# Altium PCB PCB_layout.PcbDoc
Units mil, origin at the board's own origin, x right, y up, seen from the top; angles counter-clockwise.
Board outline 2835 x 2605 mil, 2 copper layers (Top Layer, Bottom Layer); 31 components, 31 nets, 111 pads, 6 vias.
Unrouted connection lines stored in the file: 1.
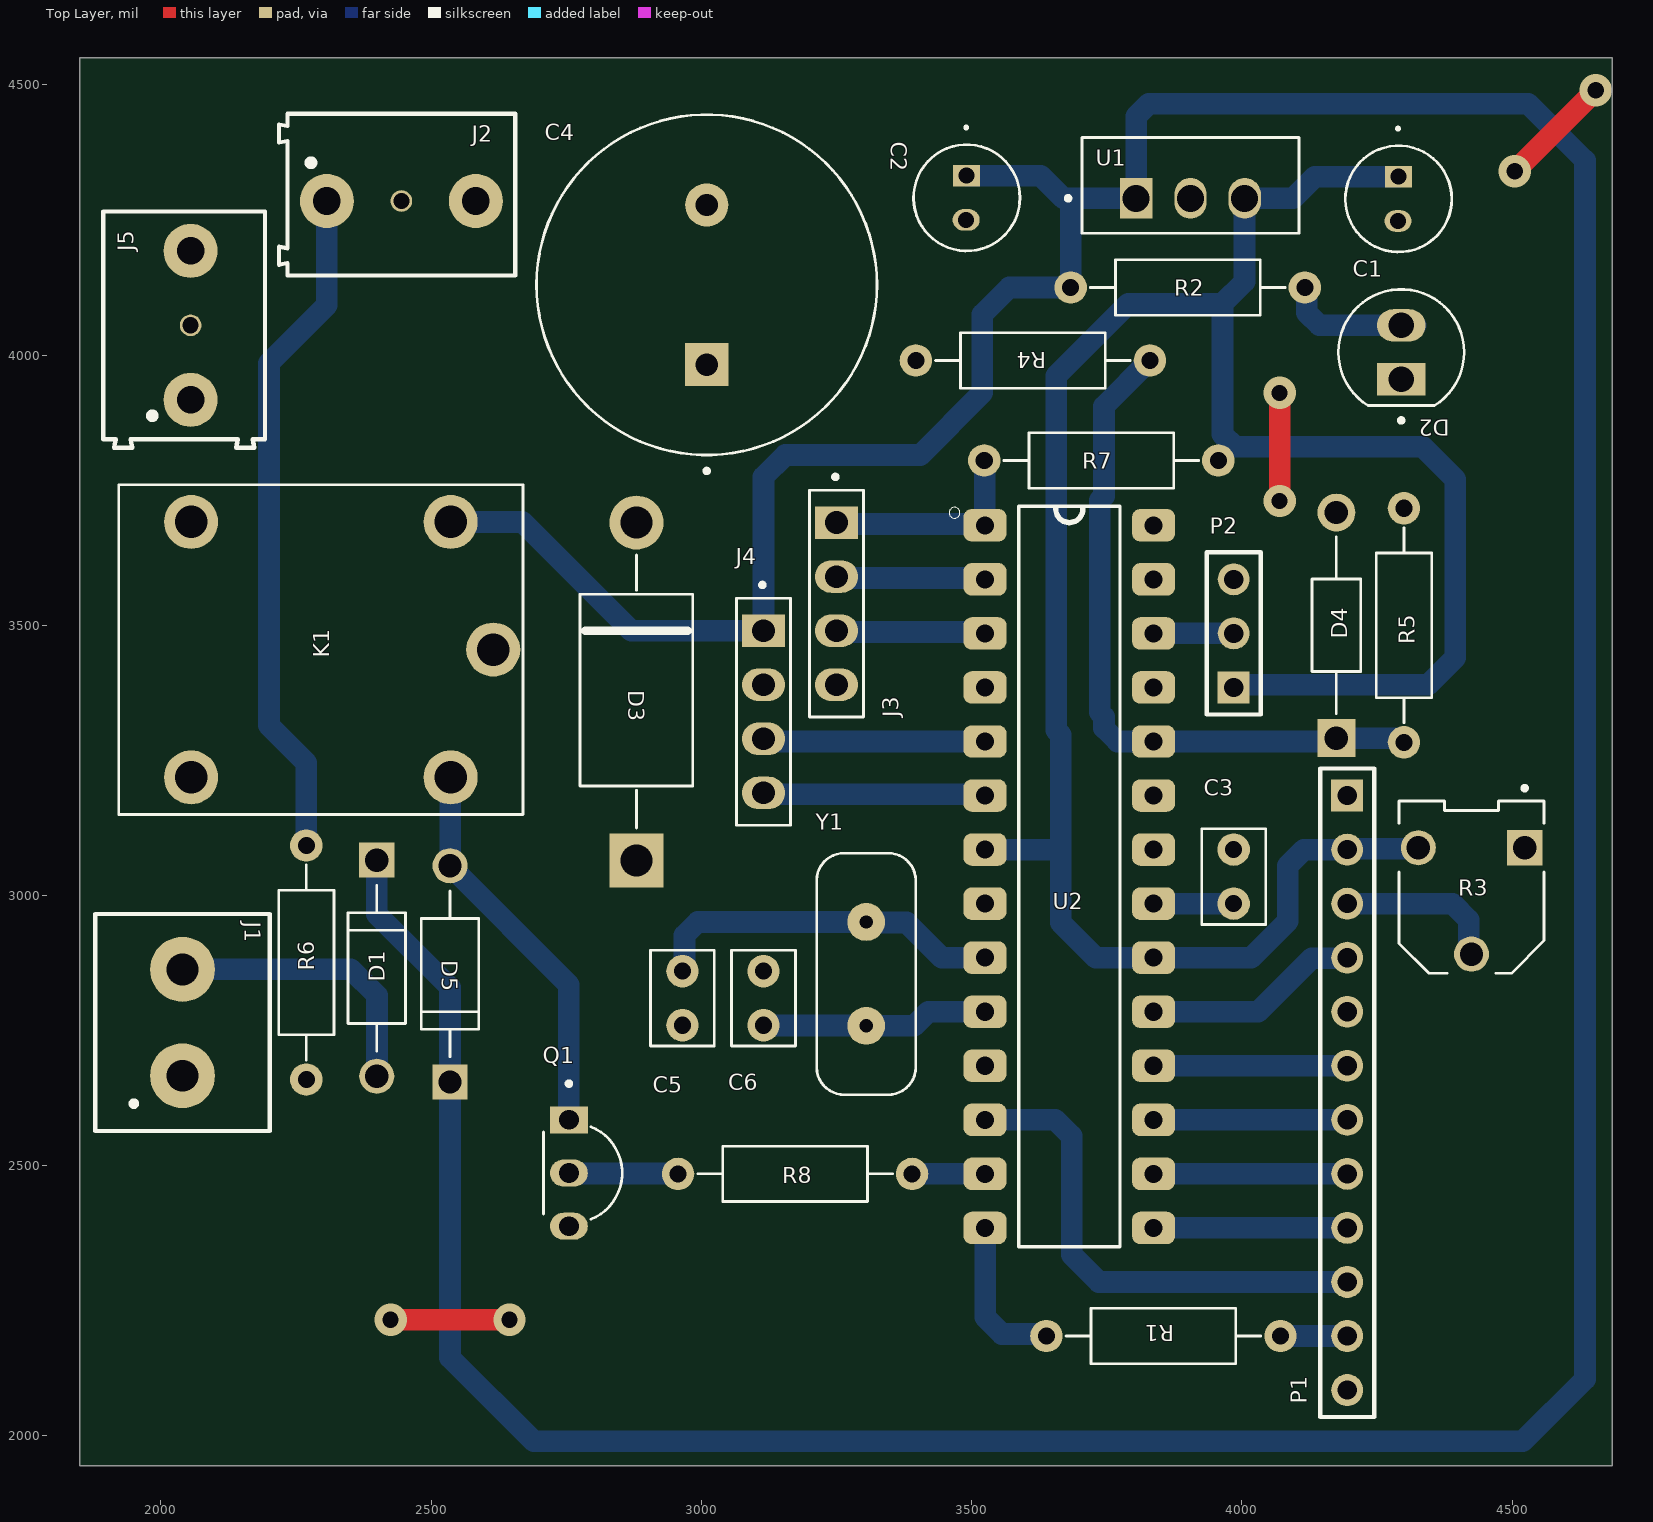
[diagram p0: Top Layer view]
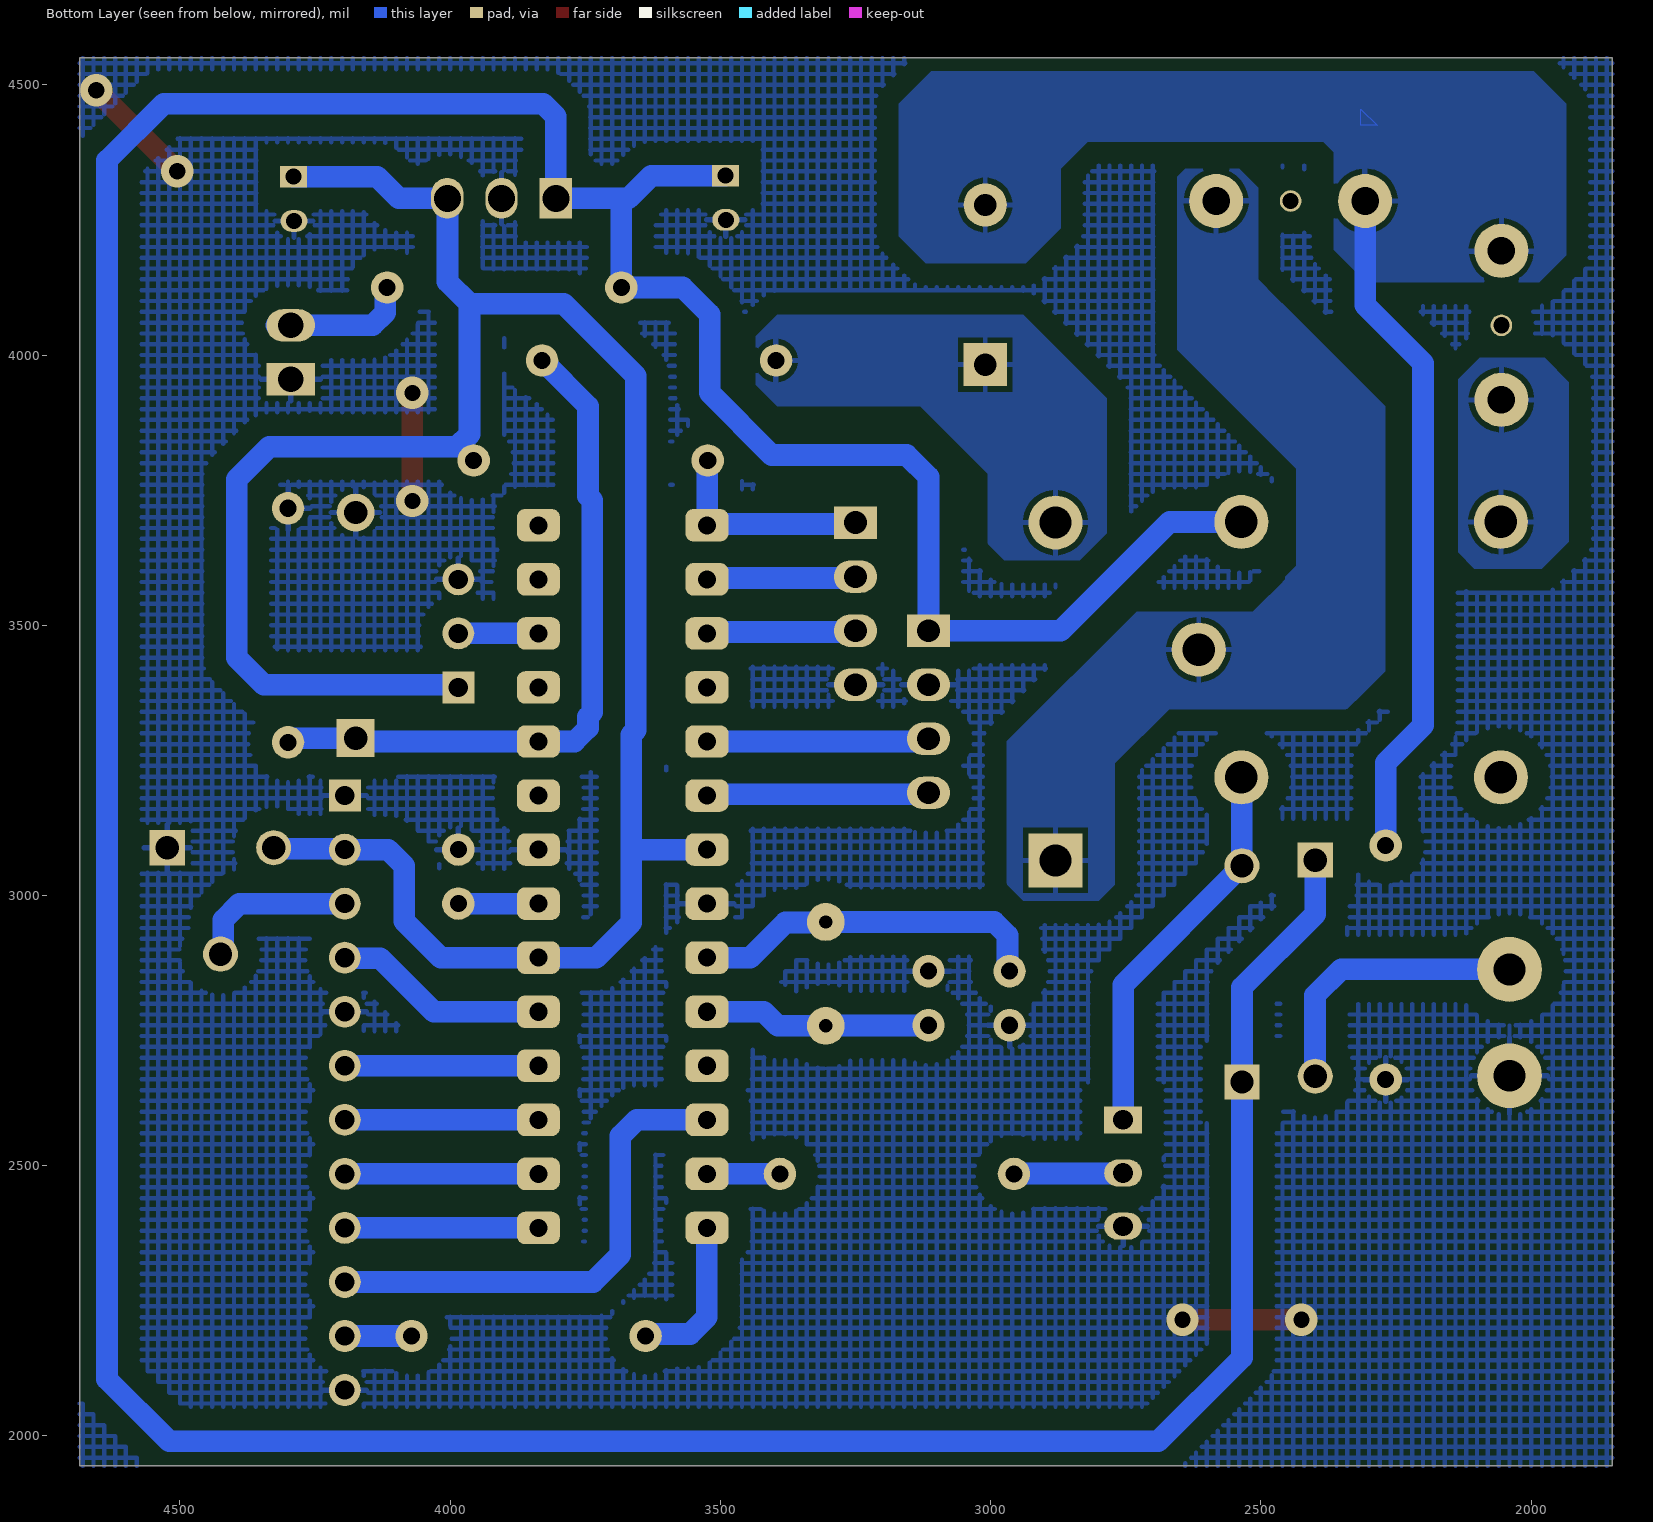
[diagram p1: Bottom Layer view, seen from below]
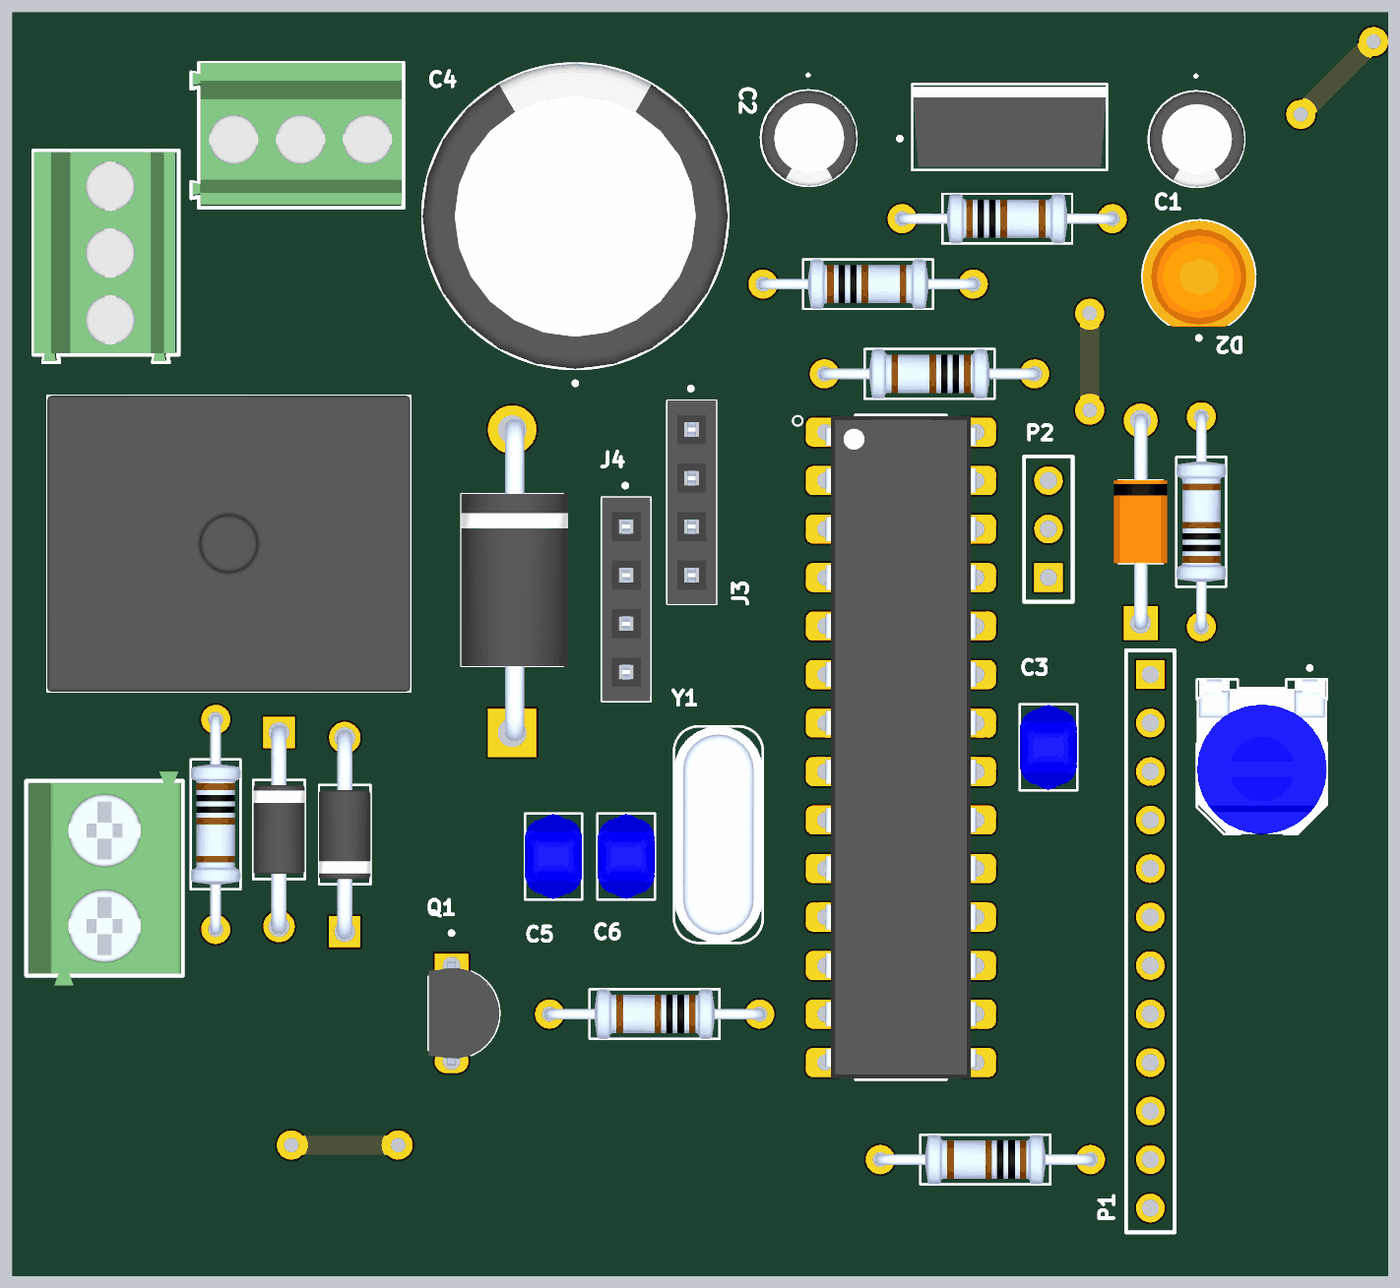
[diagram p2: 3D render of the assembled board from above, using the file's embedded part models]

## Layer stack, top to bottom
Top Solder: solder mask 0.4, Solder Resist, Dk 3.5
Top Layer: signal copper 1.4
Dielectric 1: dielectric 12.6, FR-4, Dk 4.8
Bottom Layer: signal copper 1.4
Bottom Solder: solder mask 0.4, Solder Resist, Dk 3.5

## Board outline
1850,1945 4685,1945 4685,4550 1850,4550

## Design rules (kind name [scope] priority, off if disabled: settings)
Clearance [All] p1: gap=40 ignorepadtopadclearanceinfootprint=FALSE
PolygonConnect [All] p1: connectstyle=Relief reliefconductorwidth=10 reliefentries=4 polygonreliefangle="90 Angle" airgapwidth=10
RoutingVias [All] p1: holewidth=30 width=60 viastyle="Through Hole" minholewidth=30 minwidth=60 maxholewidth=30 maxwidth=60
SolderMaskExpansion [All] p1: expansion=4 istentingtop=FALSE
Width [All] p1: maxlimit=70 minlimit=30 preferedwidth=50
30 further rules are at their usual default settings.

## Components (designator, comment, footprint, x,y, rotation, side; value= is the part's Value field where it differs from the comment)
C1 "10uF" CAPPRD500W50D500H1100 4290,4289 r270 top
C2 "2200uF" CAPPRD500W50D500H1100 3491,4291 r270 top
C3 "100nF" CAPRB500W50L450T300H550 3985,3085 r270 top
C4 "2200uF" CAPPRD750W80D1600H2500 3010,4130 r90 top
C5 "22pF" CAPRB500W50L450T300H550 2965,2760 r90 top
C6 "22pF" CAPRB500W50L450T300H550 3115,2860 r270 top
D1 "1N4007" DIOAD1060W80L520D270 2399.47,2865.62 r270 top
D2 "L08R5000Q1" LEDRD254W57D500H1070 4295,4005 r90 top
D3 "1N5404" DIOAD1990W125L900D530 2880,3380 r90 top
D4 "1N4745A" DIOAD1060W70L435D230 4175,3500 r90 top
D5 "1N4007" DIOAD1060W80L520D270 2535,2855 r90 top
J1 "TBlock 2" 691111710002 2040,2765 r90 top
J2 "TBlock 3" 691214110003 2445,4285 r0 top
J3 "Header 4" SULLINS_PPTC041LFBN-RC 3250,3540 r270 top
J4 "Header 4" SULLINS_PPTC041LFBN-RC 3115,3340 r270 top
J5 "TBlock 3" 691214110003 2055,4055 r90 top
K1 "JQC-3F-1C-24VDC" RELAY_JQC-3F-1C-24VDC 2296.1,3455 r0 top
P1 "Header 12" HDR1X12 4195,3185 r270 top
P2 "Header 3" HDR1X3 3985,3385 r90 top
Q1 "BC547" TO92250P510H770-3 2780.79,2486.57 r270 top
R1 "220" RESAD1100W55L680D260 3855,2185 r0 top
R2 "1k5" RESAD1100W55L680D260 3900,4125 r180 top
R3 "1k" TRIM_3306F-1-105 4425,2990 r270 top
R4 "6M2" RESAD1100W55L680D260 3613.46,3990 r180 top
R5 "120k" RESAD1100W55L680D260 4300,3500 r270 top
R6 "6M2" RESAD1100W55L680D260 2269.04,2876.05 r90 top
R7 "10k" RESAD1100W55L680D260 3740,3805 r0 top
R8 "10k" RESAD1100W55L680D260 3173.46,2485 r0 top
U1 "LM7805" TO255P1020X450X1968-3 3905,4313.82 r0 top
U2 "ATMEGA328P-PU" DIP794W46P254L2967H457Q28B 3680.91,3035 r0 top
Y1 "16MHz" XTAL_ECS-160-20-4X 3305,2855 r270 top

## Footprints (in the part's own frame and the unit in brackets; to place one, negate y for a bottom-side part, rotate by r counter-clockwise, add the part's x,y. Pads: shape width x height; smd on the part's side, far side on the other; paste and mask are expansions set on the pad)
691111710002 [mil]
  round 120 hole 59.06: 1(-98.43,0) 2(98.43,0)
  silkscreen extent -201,-161 201,161, body extent -220,-157 220,157, height 434
691214110003 [mm]
  round 2.54 hole 1.3: 1(-3.5,0) 3(3.5,0)
  round 1.016 hole 0.762: 2(0,0)
  silkscreen extent -5.75,-3.5 5.35,4.1, body extent -5.68,-3.32 5.28,4.08, height 8.51
CAPPRD500W50D500H1100 [mil]
  oval 40x50 hole 29.53: N(41,-1)
  rect 40x50 hole 29.53: P(-41,0)
  silkscreen extent -131,-98 98,98, body extent -108,-97 108,99, height 434
CAPPRD750W80D1600H2500 [mil]
  round 80 hole 41.34: N(147.64,0)
  rect 80x80 hole 41.34: P(-147.64,0)
  silkscreen extent -348,-315 315,315, body extent -315,-315 315,315, height 984
CAPRB500W50L450T300H550 [mil]
  round 60 hole 31.5: 1(0,0) 2(100,0)
  silkscreen extent -39,-59 139,59, body extent -38,-59 138,59, height 210
DIOAD1060W70L435D230 [mil]
  round 70 hole 43.31: A(208.66,0)
  rect 70x70 hole 43.31: C(-208.66,0)
  silkscreen extent -164,-45 164,45, body extent -222,-55 222,55, height 110
DIOAD1060W80L520D270 [mm]
  round 1.65 hole 1.1: A(5.08,0)
  rect 1.65x1.65 hole 1.1: C(-5.08,0)
  silkscreen extent -3.9,-1.35 3.9,1.35, body extent -5.47,-1.35 5.47,1.35, height 2.52
DIOAD1990W125L900D530 [mil]
  rect 100x100 hole 59.06: A(-315,0)
  round 100 hole 59.06: C(310,0)
  silkscreen extent -255,-104 250,104, body extent -332,-115 332,105, height 220
DIP794W46P254L2967H457Q28B [mil]
  rrect50% 80x60 hole 33.46: 1(-155.91,650) 2(-155.91,550) 3(-155.91,450) 4(-155.91,350) 5(-155.91,250) 6(-155.91,150) 7(-155.91,50) 8(-155.91,-50) 9(-155.91,-150) 10(-155.91,-250) 11(-155.91,-350) 12(-155.91,-450) 13(-155.91,-550) 14(-155.91,-650) 15(155.91,-650) 16(155.91,-550) 17(155.91,-450) 18(155.91,-350) 19(155.91,-250) 20(155.91,-150) 21(155.91,-50) 22(155.91,50) 23(155.91,150) 24(155.91,250) 25(155.91,350) 26(155.91,450) 27(155.91,550) 28(155.91,650)
  silkscreen extent -223,-685 94,685, body extent -156,-682 156,683, height 180
HDR1X3 [mm] "Connector; Header; 3 Position"
  rect 1.5x1.5 hole 0.9: 1(0,0)
  round 1.5 hole 0.9: 2(2.54,0) 3(5.08,0)
  silkscreen extent -1.27,-1.27 6.35,1.27
HDR1X12 [mm] "Connector; Header; 12 Position"
  rect 1.5x1.5 hole 0.9: 1(0,0)
  round 1.5 hole 0.9: 2(2.54,0) 3(5.08,0) 4(7.62,0) 5(10.16,0) 6(12.7,0) 7(15.24,0) 8(17.78,0) 9(20.32,0) 10(22.86,0) 11(25.4,0) 12(27.94,0)
  silkscreen extent -1.27,-1.27 29.21,1.27
LEDRD254W57D500H1070 [mil]
  oval 60x90 hole 47.64: A(50,0)
  rect 60x90 hole 47.64: C(-50,0)
  silkscreen extent -130,-116 116,116, body extent -102,-116 116,116, height 358
RELAY_JQC-3F-1C-24VDC [mm]
  round 2.54 hole 1.524: COIL1(6.1,6) COIL2(6.1,-6) COM(8.1,0) NC(-6.1,-6) NO(-6.1,6)
  silkscreen extent -9.5,-7.75 9.5,7.75, body extent -9.5,-7.75 9.5,7.75, height 15.51
RESAD1100W55L680D260 [mil]
  round 60 hole 31.5: 1(-216.54,0) 2(216.54,0)
  silkscreen extent -180,-51 180,51, body extent -227,-51 227,51, height 101
SULLINS_PPTC041LFBN-RC [mil]
  rect 60x80 hole 42.13: 1(-150,0)
  oval 60x80 hole 42.13: 2(-50,0) 3(50,0) 4(150,0)
  silkscreen extent -239,-50 210,50, body extent -210,-50 210,50, height 335
TO255P1020X450X1968-3 [mm]
  rect 1.524x1.91 hole 1.27: 1(-2.55,-0.605)
  oval 1.524x1.91 hole 1.27: 2(0,-0.605) 3(2.55,-0.605)
  silkscreen extent -5.85,-2.25 5.1,2.25, body extent -5.08,-2.09 5.08,2.11, height 22.87
TO92250P510H770-3 [mm]
  rect 1.27x1.778 hole 0.93: 1(-2.5,-0.655)
  oval 1.27x1.778 hole 0.93: 2(0,-0.655) 3(2.5,-0.655)
  silkscreen extent -4.3,-1.85 2.18,1.85, body extent -2.73,-1.85 2.73,1.85, height 8.7
TRIM_3306F-1-105 [mm]
  rect 1.65x1.65 hole 1.1: 1(-2.5,2.5)
  round 1.65 hole 1.1: 2(2.5,0) 3(-2.5,-2.5)
  silkscreen extent -5.4,-3.4 3.4,3.4, body extent -4.7,-3.4 3.4,3.4, height 8.38
XTAL_ECS-160-20-4X [mil]
  round 70 hole 24.8: 1(-96.06,0) 2(96.06,0)
  silkscreen extent -223,-92 223,92, body extent -223,-92 223,92, height 138

## Part data
C1 C2: library part "Electrolytic capacitor", "FS-A", Package=None, Availability=Unavailable, MF="{'manufacturer': u'Panasonic'}", MP=EEUFS0J221B, Price=None
C3 C5 C6: library part "Ceramic capacitor", "2200 pF Â±10% 250V Ceramic Capacitor X7R Radial", Package="Radial TDK", Check_prices=https://www.snapeda.com/parts/FG24X7R2E222KNT06/TDK/view-part/?ref=eda, Digi-Key_Part_Number=445-173386-1-ND, MF=TDK, MP=FG24X7R2E222KNT06, Purchase-URL=https://pricing.snapeda.com/search/part/FG24X7R2E222KNT06/?ref=eda, SnapEDA_Link=https://www.snapeda.com/parts/FG24X7R2E222KNT06/TDK/view-part/?ref=snap
C4: library part "Capacitor (16 x 25mm)", "Cap Aluminum 33uF 400V 20% (16 X 25mm) Radial Aluminum Cylindrical Can 7.5mm 275mA 2000 hr 85Â°C Bulk", Package="RADIAL-2 Panasonic", Availability="In Stock", Check_prices=https://www.snapeda.com/parts/ECA2GM330/Panasonic/view-part/5790262/?ref=eda, MF=Panasonic, MP=ECA2GM330, Price=None, Purchase-URL=https://pricing.snapeda.com/search/part/ECA2GM330/?ref=eda, SnapEDA_Link=https://www.snapeda.com/parts/ECA2GM330/Panasonic/view-part/5790262/?ref=snap
D1 D5: "Diode Switching 1KV 1A 2-Pin DO-41", Package=None, Availability=Unavailable, MP=1N4007, Price=None
D2: library part LED, "LED, Orange, Through Hole, T-1 3/4 (5mm), 30 mA, 2.1 V, 635 nm", Package=None, Availability=Unavailable, MF="{'manufacturer': u'LED Technology'}", MP=L08R5000Q1, Price=None
D3: library part "Schrotic diode", "Diode Standard 400 V 3A Through Hole DO-201AD", Package="AXIAL LEAD-2 ON Semiconductor", Availability="In Stock", Check_prices=https://www.snapeda.com/parts/1N5404/Onsemi/view-part/?ref=eda, MF="ON Semiconductor", MP=1N5404, Price=None, Purchase-URL=https://pricing.snapeda.com/search/part/1N5404/?ref=eda, SnapEDA_Link=https://www.snapeda.com/parts/1N5404/Onsemi/view-part/?ref=snap
D4: library part "Zenner diode", "Zener Diode 16V 1W Â±5% Through Hole DO-204AL (DO-41)", Package="DO-41-2 ON Semiconductor", Availability="In Stock", Check_prices=https://www.snapeda.com/parts/1N4745A/Onsemi/view-part/?ref=eda, MF="ON Semiconductor", MP=1N4745A, Price=None, Purchase-URL=https://pricing.snapeda.com/search/part/1N4745A/?ref=eda, SnapEDA_Link=https://www.snapeda.com/parts/1N4745A/Onsemi/view-part/?ref=snap
J1: library part "Terminal Block - 2Pins", "2 Position Wire to Board Terminal Block Horizontal with Board 0.197 _5.00mm_ Through Hole", Package=None, Availability=Unavailable, MF="Wurth Electronics", MP=691111710002, Price=None, SnapEDA_Link=https://www.snapeda.com/parts/691111710002/Wurth%20Electronics%20Inc./view-part/1195092/?ref=snap
J2 J5: library part "Terminal blocks - 3Pins (Small)", "3 Position Wire to Board Terminal Block Horizontal with Board 0.138 (3.50mm) Through Hole", Package=None, Availability="In Stock", Check_prices=https://www.snapeda.com/parts/691214110003/Wurth+Elektronik/view-part/?ref=eda, MF="Wurth Elektronik", MP=691214110003, Price=None, Purchase-URL=https://pricing.snapeda.com/search/part/691214110003/?ref=eda, SnapEDA_Link=https://www.snapeda.com/parts/691214110003/Wurth+Elektronik/view-part/?ref=snap
J3 J4: library part "Female header - 4Pins", "4 Position Header Connector Through Hole", Package=None, Availability=Warning, Check_prices=https://www.snapeda.com/parts/PPTC041LFBN-RC/Sullins%20Connector%20Solutions/view-part/285917/?ref=eda, MF="Sullins Connector", MP=PPTC041LFBN-RC, Price=None, Purchase-URL=https://pricing.snapeda.com/search/part/PPTC041LFBN-RC/?ref=eda, SnapEDA_Link=https://www.snapeda.com/parts/PPTC041LFBN-RC/Sullins%20Connector%20Solutions/view-part/285917/?ref=snap
K1: library part "Relay (Standard)", "Miniature PCB Relay 24VDC, 10A 250VAC, 15A 125VAC, 10A 250VAC", Package=None, Availability=Unavailable, MP=JQC-3F-1C-24VDC, Price=None
P1: "Header, 12-Pin", LatestRevisionDate=17-Jul-2002, LatestRevisionNote="Re-released for DXP Platform.", Publisher="Altium Limited"
P2: "Header, 3-Pin", LatestRevisionDate=17-Jul-2002, LatestRevisionNote="Re-released for DXP Platform.", Publisher="Altium Limited"
Q1: library part BC547B, "<a href=\"https://pricing.snapeda.com/parts/BC337-16%20A1/Taiwan%20Semiconductor/view-part?ref=eda\">Check availability</a> <a href=\"https://pricing.snapeda.com/parts/BC337-16%20A1/Taiwan%20Semiconductor/view-part?ref=eda\">Check availability</a>", Package=None, Availability=Unavailable, MP=BC547B, Price=None
R1 R2 R4 R5 R6 R7 R8: library part "Resistor (0.25W)", "(MFR-25FBF52-10K) 10,2 kOhm bei 1% 0,25W, 1/4W Durchbohrlochwiderstand Axial Metal Film", Package="Axial Yageo", Digi-Key_Part_Number=10.2KXBK-ND, MF=Yageo, MP=MFR-25FBF52-10K, Purchase-URL=https://pricing.snapeda.com/search/part/MFR-25FBF52-10K/?ref=eda, SnapEDA_Link=https://www.snapeda.com/parts/MFR-25FBF52-10K/Yageo/view-part/424333/?ref=snap
R3: library part Potentiometer1, "(3306F-1-105) 1 MOhms 0.2W, 1/5W PC Pins Through Hole Trimmer Potentiometer Cermet 1 Turn Top Adjustment", Package="3306F Bourns", Availability=Good, Check_prices=https://www.snapeda.com/parts/3306F-1-105/Bourns%20-%20J.W.%20Miller/view-part/862876/?ref=eda, MF=Bourns, MP=3306F-1-105, Price=None, Purchase-URL=https://pricing.snapeda.com/search/part/3306F-1-105/?ref=eda, SnapEDA_Link=https://www.snapeda.com/parts/3306F-1-105/Bourns%20-%20J.W.%20Miller/view-part/862876/?ref=snap
U1: library part LM78__, Package=None, Availability=Unavailable, MP=LM7805CT/NOPB, Price=None
U2: "ATmega Series 20 MHz 32 KB Flash 2 KB SRAM 8-Bit Microcontroller - DIP-28", Package=None, Availability=Unavailable, MP=ATMEGA328P-PU, Price=None
Y1: library part "Crystal oscilator", "CRYSTAL T/H", Package=None, Availability=Unavailable, MF="{'manufacturer': u'ECS Inc.'}", MP=ECS-160-S-4, Price=None

## Via types
v1: diameter 60, hole 30, Top Layer to Bottom Layer, 6 vias

## Nets (pads, with @x,y where several pads share a name; then routed paths per layer and width w, separated by ;. In a path a pad name is that pad's centre, name@x,y a point inside that pad or via, vN(x,y) a via of type N, cw(c..) or ccw(c..) an arc to the next point about the centre after c; other vN are vias at no path point)
+12: C2.P D1.C D5.C J4.1 K1.COIL1 R2.2 U1.1 | length 8720.2
  Bottom Layer w40: D1.C 2399.47,2965.53 2535,2830 D5.C 2535,2145 2690,1990 4520,1990 4635,2105 4635,4360 4530,4465 3828.04,4465 3804.61,4441.57 U1.1 3683.46,4290 ; K1.COIL1 2668.78,3691.22 2870,3490 J4.1 3115,3775 3155,3815 3405,3815 3520,3930 3520,4075 3570,4125 R2.2 3683.46,4290 ; C2.P 3628,4332 3670,4290 3683.46,4290
AGND: C4.N J2.1 J5.3 R6.2 | length 1265.4
  Bottom Layer w40: R6.2 2269.04,3245.96 2200,3315 2200,3985 2307.2,4092.2 J2.1
backligh: R1.1 U2.14 | length 293
  Bottom Layer w40: U2.14 3525,2220 3556.17,2188.83 3634.64,2188.83 R1.1
D4: P1.7 U2.17 | length 358.2
  Bottom Layer w40: U2.17 P1.7
D5: P1.8 U2.16 | length 358.2
  Bottom Layer w40: U2.16 P1.8
D6: P1.9 U2.15 | length 358.2
  Bottom Layer w40: U2.15 P1.9
D7: P1.10 U2.12 | length 923.1
  Bottom Layer w40: U2.12 3655,2585 3685,2555 3685,2335 3735,2285 P1.10
EN: P1.6 U2.18 | length 358.2
  Bottom Layer w40: U2.18 P1.6
GND: C1.N C2.N C3.1 C5.1 C6.1 D2.C D4.A J1.1 J3.4 J4.2 P1.1 P1.5 P1.12 P2.3 Q1.3 R3.1 R5.1 R6.1 U1.2 U2.8 U2.22 | length 632.1
  Top Layer w40: v1(2425,2215) v1(2645,2215) ; v1(4070,3730) v1(4070,3930) ; v1(4505,4340) v1(4655,4490)
gsm_rx: J4.3 U2.5 | length 412.1
  Bottom Layer w40: J4.3 3118.83,3286.17 3142.97,3286.17 3144.14,3285 U2.5
gsm_tx: J4.4 U2.6 | length 412.1
  Bottom Layer w40: J4.4 3117.5,3187.5 3522.5,3187.5 U2.6
LIVE: D3.A J2.3 K1.COM
NetC3_2: C3.2 U2.21 | length 148.2
  Bottom Layer w40: U2.21 C3.2
NetC4_P: C4.P D3.C R4.2
NetD1_A: D1.A J1.2 | length 529.7
  Bottom Layer w40: J1.2 2351.57,2863.43 2400,2815 2400,2666.14 D1.A
NetD2_A: D2.A R2.1 | length 259
  Bottom Layer w40: R2.1 4120.36,4121.17 4120.36,4078.43 4143.79,4055 D2.A@4321.5,4055
NetD5_A: D5.A K1.COIL2 Q1.1 | length 725.4
  Bottom Layer w40: K1.COIL2 2535.63,3218.15 2535.63,3055.63 D5.A 2755,2835 Q1.1
NetJ5_1: J5.1 K1.NO
NetP1_3: P1.3 R3.2 | length 302.9
  Bottom Layer w40: P1.3 4390,2985 4420.22,2954.78 4420.22,2896.35 R3.2
NetP1_11: P1.11 R1.2 | length 123.5
  Bottom Layer w40: R1.2 P1.11
NetQ1_2: Q1.2 R8.1 | length 202.6
  Bottom Layer w40: Q1.2 2755.79,2485.79 2956.14,2485.79 R8.1
reset: J3.1 R7.1 U2.1 | length 396.6
  Bottom Layer w40: J3.1 3252.5,3687.5 3522.5,3687.5 U2.1@3524.23,3685.77 ; R7.1 3524.23,3804.23 U2.1@3524.23,3685.77 ; U2.1 U2.1@3524.23,3685.77
RS: P1.4 U2.19 | length 399.6
  Bottom Layer w40: U2.19 4030.54,2785 4129.74,2884.19 4194.19,2884.19 P1.4
rx: J3.3 U2.3 | length 277.1
  Bottom Layer w40: J3.3 3252.5,3487.5 3522.5,3487.5 U2.3
sensor: P2.2 U2.26 | length 148.2
  Bottom Layer w40: U2.26 P2.2
switch: R8.2 U2.13 | length 135
  Bottom Layer w40: R8.2 U2.13
tx: J3.2 U2.2 | length 277.1
  Bottom Layer w40: J3.2 3252.5,3587.5 3522.5,3587.5 U2.2
VCC: C1.P P1.2 P2.1 R3.3 R7.2 U1.3 U2.7 U2.20 | length 4333.5
  Bottom Layer w40: U2.7 3665,3085 ; P2.1 3990,3390 4345,3390 4395,3440 4395,3770 4335,3830 3987.61,3830 3964.18,3853.43 3964.18,4095 ; C1.P 4135,4330 4095,4290 U1.3 4005.39,4273.94 4005,4273.54 4005,4135.82 3964.18,4095 ; R3.3 4324.86,3086.71 4196.71,3086.71 P1.2 4115,3085 4085,3055 4085,2952.59 4017.41,2885 U2.20 3730,2885 3665,2950 3665,3085 ; 3665,3085 3665,3297.61 3656.81,3305.8 3656.81,3961.81 3790,4095 3964.18,4095
voltage: D4.C R4.1 R5.2 U2.24 | length 1293.2
  Bottom Layer w40: R4.1 3745,3905 3745,3739.25 3736.81,3731.07 3736.81,3338.93 3745,3330.74 3745,3310 3770,3285 4168.66,3285 D4.C 4286.71,3291.34 4294.59,3283.46 R5.2
xtal_01: C5.2 U2.9 Y1.1 | length 661.8
  Bottom Layer w40: C5.2 2968.83,2863.83 2968.83,2926.57 2993.32,2951.06 Y1.1 3306.06,2950 3380,2950 3445,2885 U2.9
xtal_02: C6.2 U2.10 Y1.2 | length 421.2
  Bottom Layer w40: C6.2 3115.53,2759.47 3304.47,2759.47 Y1.2 3393.94,2758.94 3420,2785 U2.10
pads on no net: J2.2 J5.2 K1.NC U2.4 U2.11 U2.23 U2.25 U2.27 U2.28

## Polygon pours and split planes (outlines as drawn)
AGND on Bottom Layer "AGND_L02_P003" (solid, pour order 3): 1935,4185 1935,4465 1995,4525 3110,4525 3170,4465 3170,4220 3120,4170 2935,4170 2870,4235 2870,4345 2820,4395 2385,4395 2365,4375 2365,4195 2305,4135 1985,4135
LIVE on Bottom Layer "LIVE_L02_P006" (solid, pour order 6): 2940,2990 2970,3020 2970,3285 2730,3525 2515,3525 2455,3585 2455,3590 2435,3610 2435,3790 2655,4010 2655,4330 2640,4345 2540,4345 2505,4310 2505,4140 2270,3905 2270,3415 2340,3345 2670,3345 2770,3245 2770,3020 2800,2990 2865,2990
NetJ5_1 on Bottom Layer "NETJ5_1_L02_P007" (solid, pour order 7): 2095,3995 2135,3955 2135,3635 2105,3605 1980,3605 1930,3655 1930,3950 1975,3995
GND on Bottom Layer "GND_L02_P008" (hatched 90Degree grid 20 track 8, pour order 8): 1850.07,4550 1850.07,1945 4685.17,1945 4685.32,1945.14 4685.32,4549.43 1850.64,4549.43
NetC4_P on Bottom Layer "NETC4_P_L02_P004" (solid, pour order 4): 3435,3945 3395,3905 3130,3905 3005,3780 3005,3650 2975,3620 2835,3620 2785,3670 2785,3920 2940,4075 3395,4075 3435,4035
no net on Bottom Layer "NONET_L02_P002" (solid, pour order 2): 2315,4455 2285,4425 2315,4425